# Allegro board 88E6071_TEST_V10B.brd
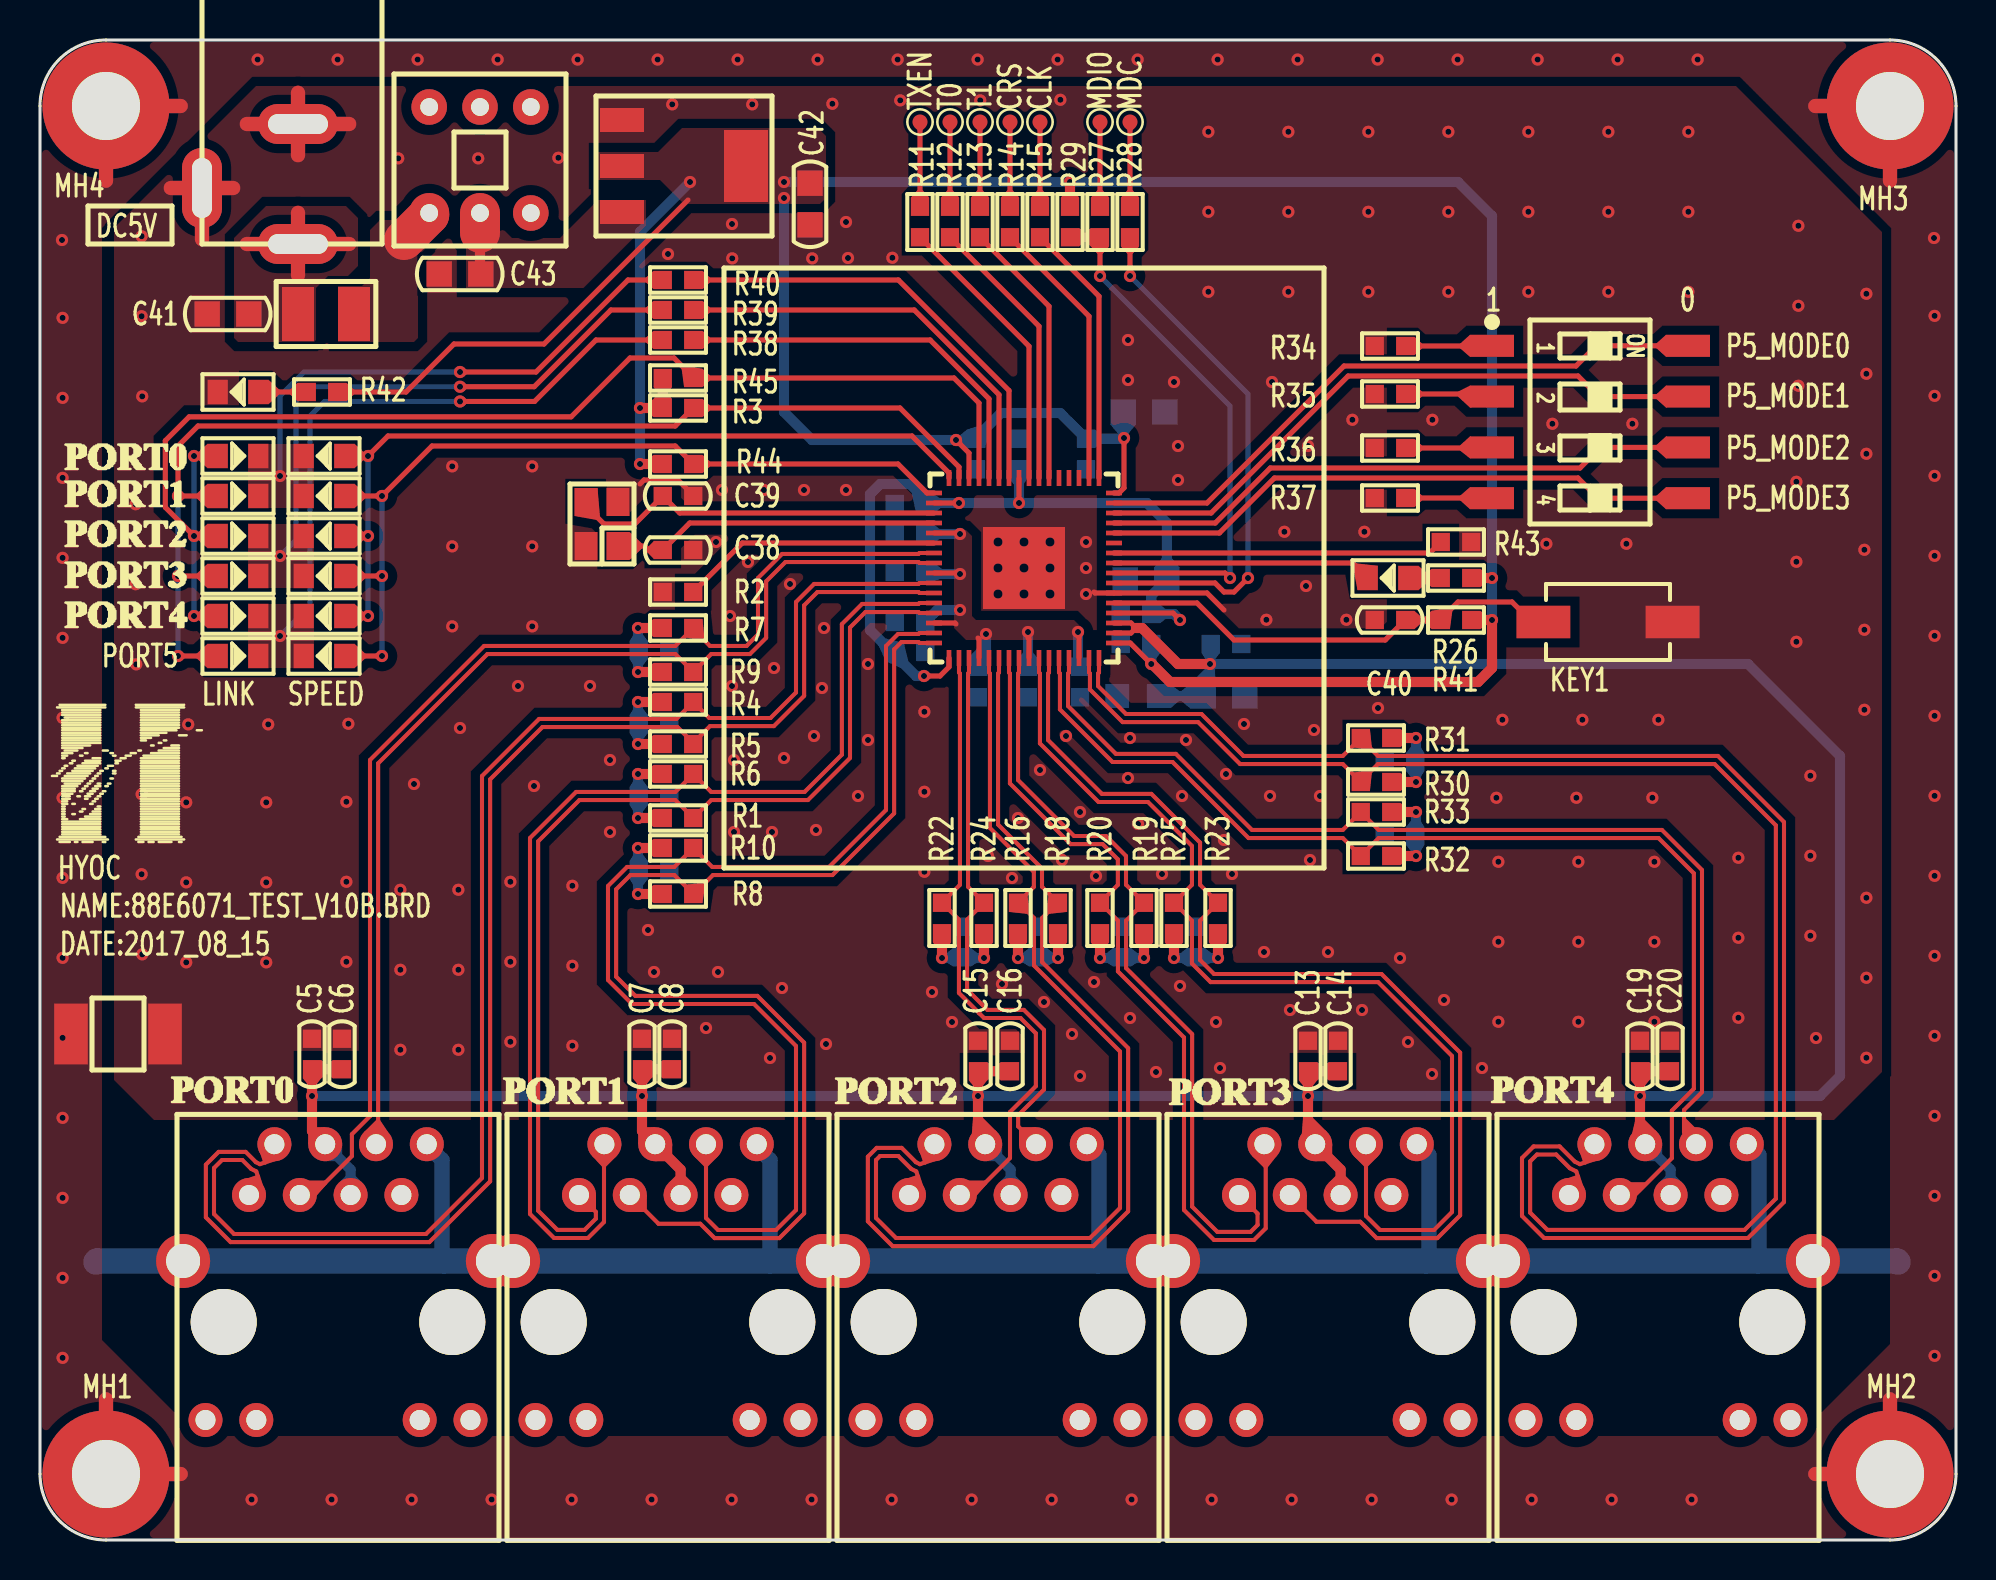
[diagram p0: board, top side]
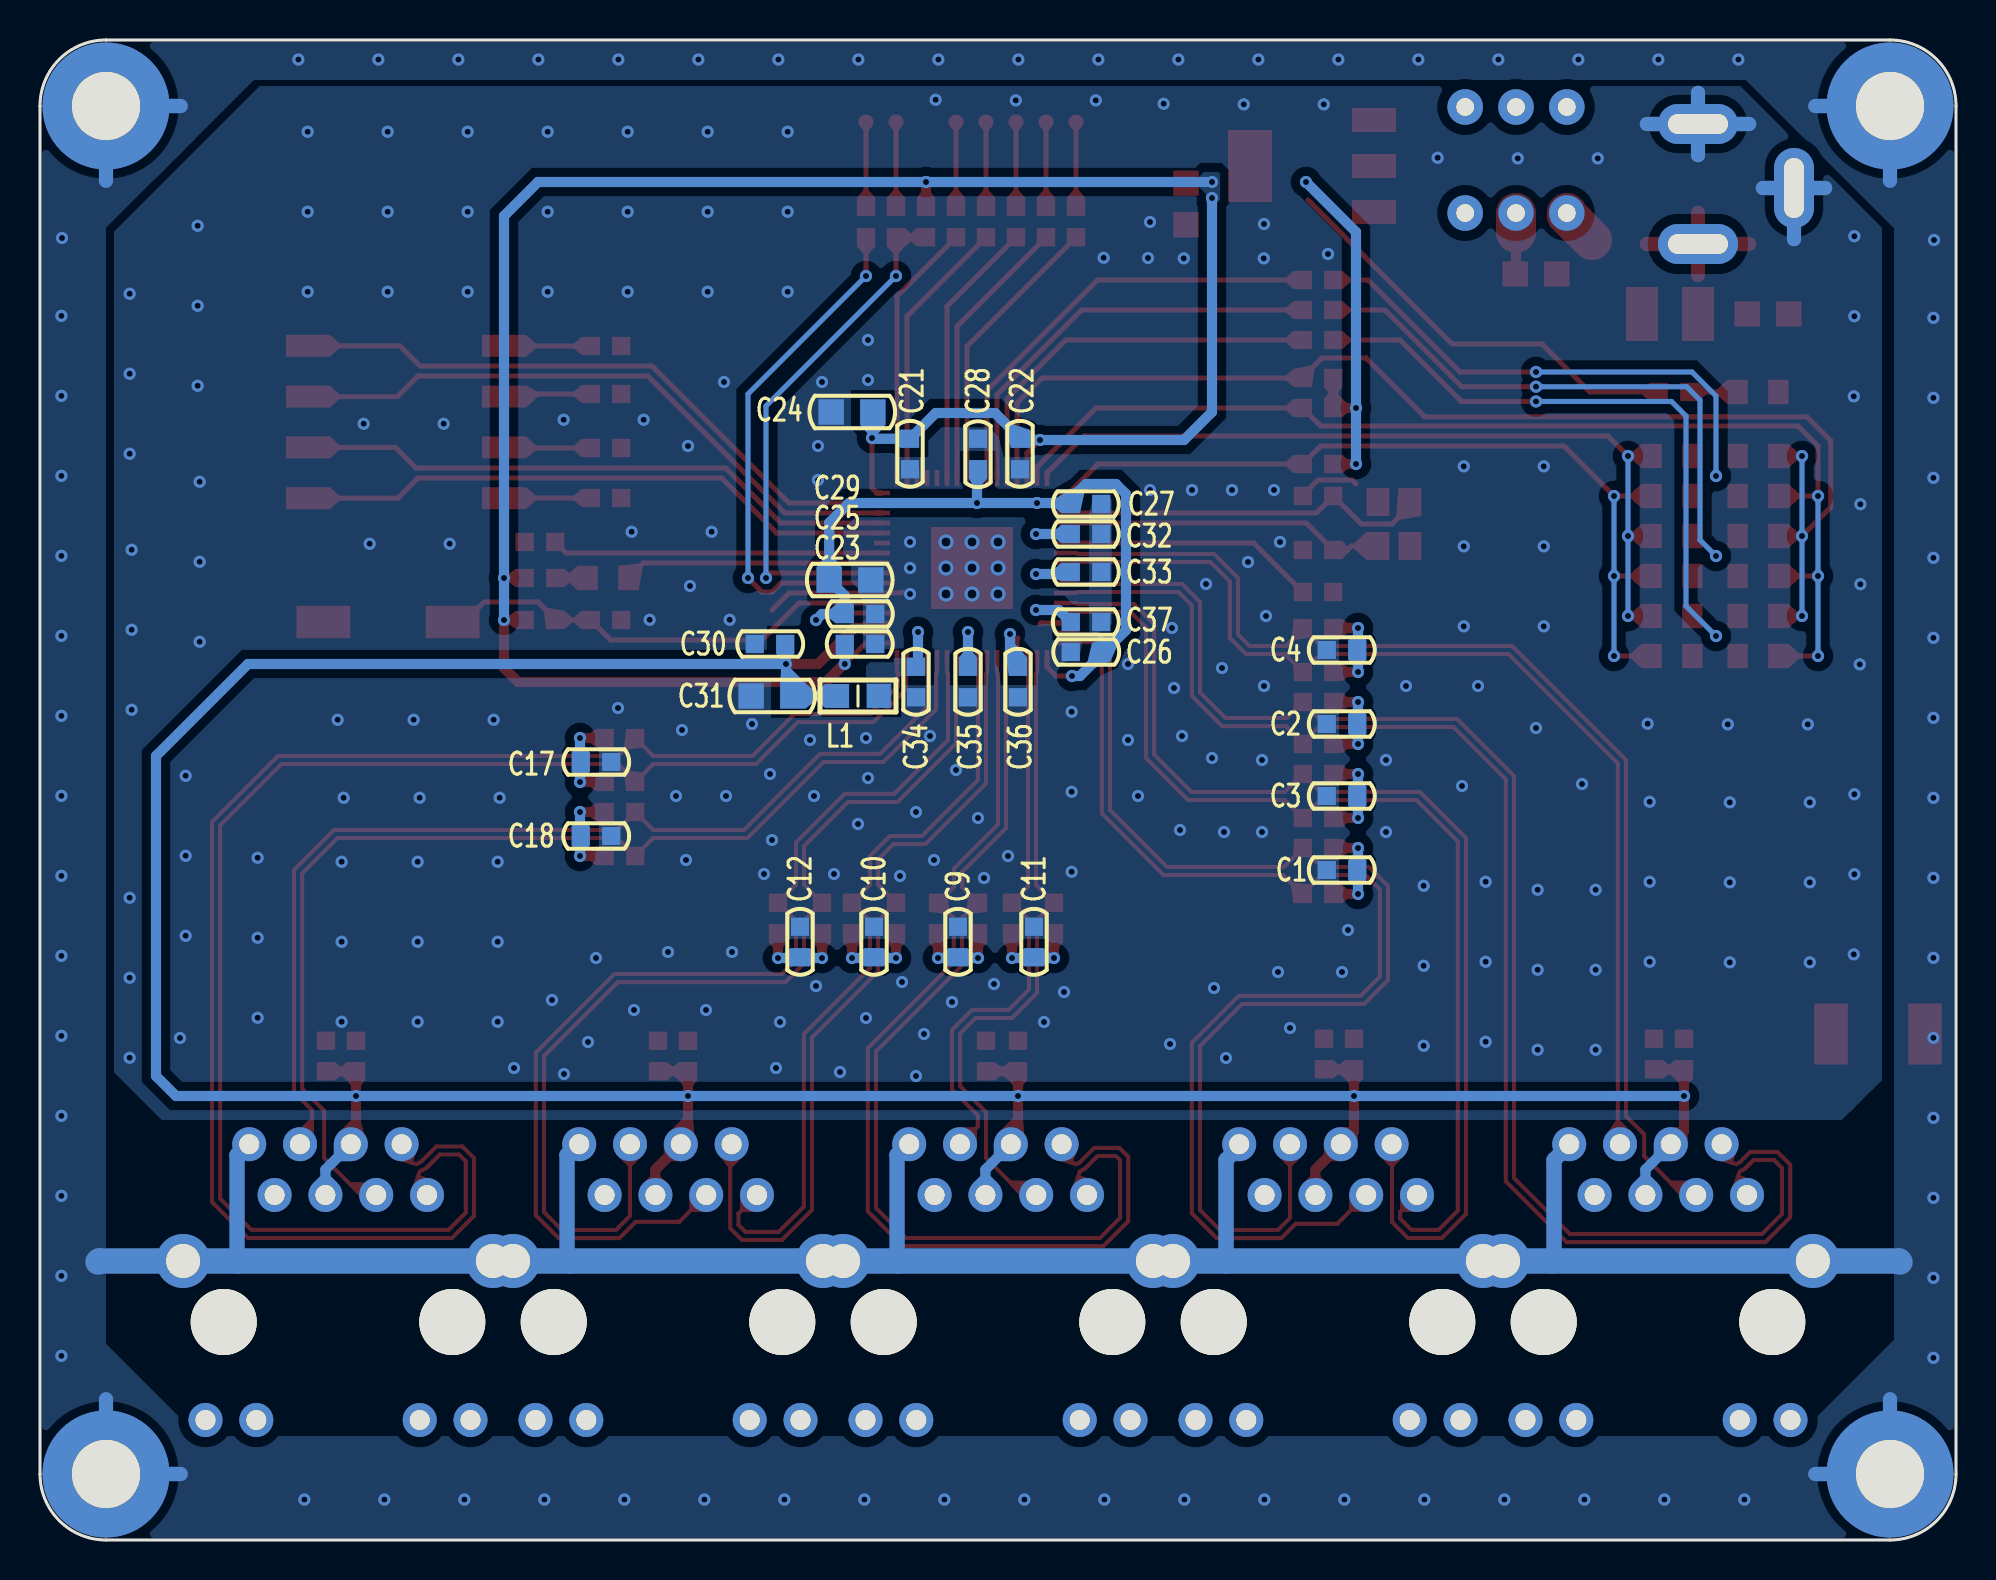
[diagram p1: board, bottom side, seen from below]

Outline 95.8 x 75 mm; copper layers: TOP, BOTTOM. Coordinates in mm from the lower left corner of the outline.
Outline path: 0,71.7 0,3.3 arc(0.97,0.97) 3.3,0 92.5,0 arc(94.83,0.97) 95.8,3.3 95.8,71.7 arc(94.83,74.03) 92.5,75 3.3,75 arc(0.97,74.03) 0,71.7

## Design rules (mm)
net group DP1: nets RXN0 RXP0
net group DP2: nets RXN1 RXP1
net group DP3: nets RXN2 RXP2
net group DP4: nets RXN3 RXP3
net group DP5: nets RXN4 RXP4
net group DP6: nets TXN0 TXP0
net group DP7: nets TXN1 TXP1
net group DP8: nets TXN2 TXP2
net group DP9: nets TXN3 TXP3
net group DP10: nets TXN4 TXP4

## Placement (name value [footprint] x y rotation side)
C1  10nF_50V  [CC0603]  30.7 33.5 0 bottom
C2  10nF_50V  [CC0603]  30.7 40.8 0 bottom
C3  10nF_50V  [CC0603]  30.7 37.2 0 bottom
C4  10nF_50V  [CC0603]  30.7 44.5 0 bottom
C5  0.1uF_50V  [CC0603]  13.6 24.3 270 top
C6  1nF_50V  [CC0603]  15.1 24.3 270 top
C7  0.1uF_50V  [CC0603]  30.1 24.3 270 top
C8  1nF_50V  [CC0603]  31.6 24.3 270 top
C9  10nF_50V  [CC0603]  49.9 29.9 90 bottom
C10  10nF_50V  [CC0603]  54.1 29.9 90 bottom
C11  10nF_50V  [CC0603]  46.1 29.9 90 bottom
C12  10nF_50V  [CC0603]  57.8 29.9 90 bottom
C13  0.1uF_50V  [CC0603]  63.4 24.2 270 top
C14  1nF_50V  [CC0603]  64.9 24.2 270 top
C15  0.1uF_50V  [CC0603]  46.9 24.2 270 top
C16  1nF_50V  [CC0603]  48.5 24.2 270 top
C17  10nF_50V  [CC0603]  68 38.9 180 bottom
C18  10nF_50V  [CC0603]  68 35.2 180 bottom
C19  0.1uF_50V  [CC0603]  80 24.2 270 top
C20  1nF_50V  [CC0603]  81.5 24.2 270 top
C21  0.1uF_50V  [CC0603]  52.3 54.3 90 bottom
C22  0.1uF_50V  [CC0603]  46.8 54.3 90 bottom
C23  0.1uF_50V  [CC0603]  54.8 44.8 0 bottom
C24  10uF_25V  [CC0805]  55.2 56.4 180 bottom
C25  0.1uF_50V  [CC0603]  54.8 46.3 0 bottom
C26  0.1uF_50V  [CC0603]  43.5 44.4 180 bottom
C27  0.1uF_50V  [CC0603]  43.5 51.8 0 bottom
C28  0.1uF_50V  [CC0603]  48.9 54.3 270 bottom
C29  10uF_25V  [CC0805]  55.3 48 0 bottom
C30  0.1uF_50V  [CC0603]  59.3 44.8 180 bottom
C31  10uF_25V  [CC0805]  59.2 42.2 180 bottom
C32  0.1uF_50V  [CC0603]  43.5 50.3 0 bottom
C33  0.1uF_50V  [CC0603]  43.5 48.4 0 bottom
C34  0.1uF_50V  [CC0603]  52 42.9 90 bottom
C35  0.1uF_50V  [CC0603]  49.4 42.9 90 bottom
C36  0.1uF_50V  [CC0603]  46.9 42.9 90 bottom
C37  0.1uF_50V  [CC0603]  43.5 45.9 0 bottom
C38  20pF_50V  [CC0603]  31.9 49.5 180 top
C39  20pF_50V  [CC0603]  31.9 52.2 180 top
C40  470pF_50V  [CC0603]  67.5 46 180 top
C41  10uF_25V  [CC0805]  9.4 61.3 180 top
C42  10uF_25V  [CC0805]  38.5 66.8 270 top
C43  10uF_25V  [CC0805]  21 63.3 180 top
D1  LED_GREEN  [LED0805]  67.4 48.1 180 top
D2  LED_GREEN  [LED0805]  14.2 54.2 180 top
D3  LED_GREEN  [LED0805]  14.2 52.2 180 top
D4  LED_GREEN  [LED0805]  14.2 50.2 180 top
D5  LED_GREEN  [LED0805]  14.2 48.2 180 top
D6  LED_GREEN  [LED0805]  14.2 46.2 180 top
D7  LED_GREEN  [LED0805]  14.2 44.2 180 top
D8  LED_YELLOW  [LED0805]  9.9 54.2 0 top
D9  LED_YELLOW  [LED0805]  9.9 52.2 0 top
D10  LED_YELLOW  [LED0805]  9.9 50.2 0 top
D11  LED_YELLOW  [LED0805]  9.9 48.2 0 top
D12  LED_YELLOW  [LED0805]  9.9 46.2 0 top
D13  LED_YELLOW  [LED0805]  9.9 44.2 0 top
D14  LED_GREEN  [LED0805]  9.9 57.4 180 top
DC1  -  [DC005]  12.9 70.8 270 top
F1  SMD1210-6V2A  [SMD-1210]  14.3 61.3 0 top
FB1  FBMH4532HM132-T  [L1812]  3.9 25.3 0 top
J1  -  [HR911105A]  14.9 10.9 180 top
J2  -  [HR911105A]  31.4 10.9 180 top
J3  -  [HR911105A]  64.4 10.9 180 top
J4  -  [HR911105A]  47.9 10.9 180 top
J5  -  [HR911105A]  80.9 10.9 180 top
KEY1  KEY  [KEY_SMD_2]  78.4 45.9 0 top
L1  BEAD_BLM21PG600  [LC0805]  54.9 42.2 180 bottom
MH1  HOLD-M3  [HOLD250D134]  3.3 3.3 0 top
MH2  HOLD-M3  [HOLD250D134]  92.5 3.3 0 top
MH3  HOLD-M3  [HOLD250D134]  92.5 71.7 0 top
MH4  HOLD-M3  [HOLD250D134]  3.3 71.7 0 top
NOREF  -  []  0 0 0 top
NOREF#2  -  []  0 0 0 top
NOREF#3  -  []  0 0 90 top
NOREF#4  -  []  0 0 90 top
NOREF#5  -  []  0 0 0 top
NOREF#6  -  []  0 0 90 top
R1  49.9R  [RC0603]  31.9 36.1 0 top
R2  4.99K  [RC0603]  31.9 47.4 0 top
R3  4.7K  [RC0603]  31.9 56.6 180 top
R4  49.9R  [RC0603]  31.9 41.9 0 top
R5  49.9R  [RC0603]  31.9 39.8 0 top
R6  49.9R  [RC0603]  31.9 38.3 0 top
R7  49.9R  [RC0603]  31.9 45.6 0 top
R8  49.9R  [RC0603]  31.9 32.3 0 top
R9  49.9R  [RC0603]  31.9 43.4 0 top
R10  49.9R  [RC0603]  31.9 34.6 0 top
R11  0R  [RC0603]  44 65.9 90 top
R12  0R  [RC0603]  45.5 65.9 90 top
R13  0R  [RC0603]  47 65.9 90 top
R14  20R  [RC0603]  48.5 65.9 90 top
R15  0R  [RC0603]  50 65.9 90 top
R16  49.9R  [RC0603]  48.9 31.1 90 top
R18  49.9R  [RC0603]  50.9 31.1 90 top
R19  49.9R  [RC0603]  55.2 31.1 90 top
R20  49.9R  [RC0603]  53 31.1 90 top
R22  49.9R  [RC0603]  45.1 31.1 90 top
R23  49.9R  [RC0603]  58.9 31.1 90 top
R24  49.9R  [RC0603]  47.2 31.1 90 top
R25  49.9R  [RC0603]  56.7 31.1 90 top
R26  150R  [RC0603]  70.8 48.1 0 top
R27  0R  [RC0603]  53 65.9 90 top
R28  0R  [RC0603]  54.5 65.9 90 top
R29  4.7K  [RC0603]  51.5 65.9 90 top
R30  49.9R  [RC0603]  66.8 37.9 180 top
R31  49.9R  [RC0603]  66.8 40.1 180 top
R32  49.9R  [RC0603]  66.8 34.2 180 top
R33  49.9R  [RC0603]  66.8 36.4 180 top
R34  4.7K  [RC0603]  67.5 59.7 0 top
R35  4.7K  [RC0603]  67.5 57.3 0 top
R36  4.7K  [RC0603]  67.5 54.6 0 top
R37  4.7K  [RC0603]  67.5 52.1 0 top
R38  150R  [RC0603]  31.9 60 180 top
R39  150R  [RC0603]  31.9 61.5 180 top
R40  150R  [RC0603]  31.9 63 180 top
R41  5.9K  [RC0603]  70.8 46 180 top
R42  2K  [RC0603]  14.1 57.4 0 top
R43  0R/NI  [RC0603]  70.8 49.9 0 top
R44  4.7K  [RC0603]  31.9 53.8 180 top
R45  4.7K/NI  [RC0603]  31.9 58.1 180 top
SW2  -  [DM-04-V]  77.5 55.9 270 top
TP4  TestPoint  [TP-0R75]  44 70.9 0 top
TP5  TestPoint  [TP-0R75]  45.5 70.9 0 top
TP6  TestPoint  [TP-0R75]  47 70.9 0 top
TP7  TestPoint  [TP-0R75]  48.5 70.9 0 top
TP8  TestPoint  [TP-0R75]  50 70.9 0 top
TP9  TestPoint  [TP-0R75]  53 70.9 0 top
TP10  TestPoint  [TP-0R75]  54.5 70.9 0 top
U1  88E6071-xx-NNC2I000  [QFN-64]  49.2 48.6 270 top
U2  X322525MSB4SI  [X-4P-3R2X2R5-SMD]  28.1 50.8 90 top
U3  AMS1117-3.3  [SOT-223]  32.2 68.7 270 top
U21  -  [SWITCH_6P]  22 69 0 top

## Library data of the parts
C1-C39 C41-C43 = CAP NP_2
C40 = CAP NP
D1-D14 = LED_4
DC1 = DC005
F1 = FUSE
FB1 = FB
J1-J5 = CON_RJ45_1X8_F_RA_0
KEY1 = SW PUSHBUTTON_0
L1 = IND_BEAD_0805_600OHM_1
MH1-MH4 = Hold_1
R1-R16 R18-R20 R22-R45 = R_Generic
SW2 = SW DIP-4_0
TP4-TP10 = TestPoint
U1 = 88E6071-xx-NNC2I000
U2 = TSX-3225
U3 = AMS1117-3.3
U21 = SWITCH_6P

## Footprints (pads in the part's own frame, mm; a bottom-side part is the same pattern mirrored in y, then rotated)
CC0603
  rect 0.914x0.914 smd: 1(-0.762,0) 2(0.762,0)
CC0805
  rect 1.27x1.27 smd: 1(-1.041,0) 2(1.041,0)
DC005
  oval 2x4 hole 1x3: 1(6,0) 2(0,0)
  oval 4x2 hole 3x1: 3(3.2,-4.8)
DM-04-V
  rect 1.1x2.2 smd: 1(-3.81,-4.9) 2(-1.27,-4.9) 3(1.27,-4.9) 4(3.81,-4.9) 5(3.81,4.9) 6(1.27,4.9) 7(-1.27,4.9) 8(-3.81,4.9)
HOLD250D134
  round 6.35 hole 3.404: 1(0,0)
HR911105A
  round 3.3 hole 3.3 unplated: (-5.715,0) (5.715,0)
  round 1.699 hole 1.001: 1(4.45,-6.35) 2(3.18,-8.89) 3(1.91,-6.35) 4(0.64,-8.89) 5(-0.63,-6.35) 6(-1.9,-8.89) 7(-3.17,-6.35) 8(-4.44,-8.89) 9(6.625,4.9) 10(4.085,4.9) 11(-4.085,4.9) 12(-6.625,4.9)
  round 2.7 hole 1.7: 13(7.745,-3.05) 14(-7.745,-3.05)
KEY_SMD_2
  rect 2.692x1.626 smd: 1(-3.23,0) 2(3.23,0)
L1812
  rect 1.676x3.048 smd: 1(-2.349,0) 2(2.349,0)
LC0805
  rect 1.194x1.194 smd: 1(-1.041,0) 2(1.041,0)
LED0805
  rect 1.016x1.219 smd: 1(-1.016,0) 2(1.016,0)
QFN-64
  rect 0.23x0.8 smd: 1(-3.75,-4.5) 2(-3.25,-4.5) 3(-2.75,-4.5) 4(-2.25,-4.5) 5(-1.75,-4.5) 6(-1.25,-4.5) 7(-0.75,-4.5) 8(-0.25,-4.5) 9(0.25,-4.5) 10(0.75,-4.5) 11(1.25,-4.5) 12(1.75,-4.5) 13(2.25,-4.5) 14(2.75,-4.5) 15(3.25,-4.5) 16(3.75,-4.5) 33(3.75,4.5) 34(3.25,4.5) 35(2.75,4.5) 36(2.25,4.5) 37(1.75,4.5) 38(1.25,4.5) 39(0.75,4.5) 40(0.25,4.5) 41(-0.25,4.5) 42(-0.75,4.5) 43(-1.25,4.5) 44(-1.75,4.5) 45(-2.25,4.5) 46(-2.75,4.5) 47(-3.25,4.5) 48(-3.75,4.5)
  rect 0.8x0.23 smd: 17(4.5,-3.75) 18(4.5,-3.25) 19(4.5,-2.75) 20(4.5,-2.25) 21(4.5,-1.75) 22(4.5,-1.25) 23(4.5,-0.75) 24(4.5,-0.25) 25(4.5,0.25) 26(4.5,0.75) 27(4.5,1.25) 28(4.5,1.75) 29(4.5,2.25) 30(4.5,2.75) 31(4.5,3.25) 32(4.5,3.75) 49(-4.5,3.75) 50(-4.5,3.25) 51(-4.5,2.75) 52(-4.5,2.25) 53(-4.5,1.75) 54(-4.5,1.25) 55(-4.5,0.75) 56(-4.5,0.25) 57(-4.5,-0.25) 58(-4.5,-0.75) 59(-4.5,-1.25) 60(-4.5,-1.75) 61(-4.5,-2.25) 62(-4.5,-2.75) 63(-4.5,-3.25) 64(-4.5,-3.75)
  rect 4.1x4.1 smd: 65(0,0)
RC0603
  rect 0.914x0.914 smd: 1(-0.762,0) 2(0.762,0)
SMD-1210
  rect 1.6x2.7 smd: 1(-1.4,0) 2(1.4,0)
SOT-223
  rect 1.2x2.2 smd: 1(-2.3,-3.1) 2(0,-3.1) 3(2.3,-3.1)
  rect 3.6x2.2 smd: 4(0,3.1)
SWITCH_6P
  round 1.778 hole 0.889: 1(-2.54,-2.65) 2(0,-2.65) 3(2.54,-2.65) 4(2.54,2.65) 5(0,2.65) 6(-2.54,2.65)
TP-0R75
  round 0.75 smd: 1(0,0)
X-4P-3R2X2R5-SMD
  rect 1.4x1.15 smd: 1(-1.1,-0.8) 2(1.1,-0.8) 3(1.1,0.8) 4(-1.1,0.8)

## Nets
GND: C1.2 C2.2 C3.2 C4.2 C5.1 C6.1 C7.1 C8.1 C9.2 C10.2 C11.2 C12.2 C13.1 C14.1 C15.1 C16.1 C17.2 C18.2 C19.1 C20.1 C21.1 C22.1 C23.1 C24.1 C25.1 C26.1 C27.1 C28.1 C29.1 C30.1 C31.1 C32.1 C33.1 C34.1 C35.1 C36.1 C37.1 C38.1 C39.1 C40.2 C41.2 C42.2 C43.2 D14.2(CATHODE) DC1.2 DC1.3 FB1.2 KEY1.2 R2.1 R34.1 R35.1 R36.1 R37.1 R43.2 U1.38(VSS) U1.65(GND) U2.2(GND1) U2.4(GND2) U3.1(GND)
GND_EARTH: FB1.1 J1.8 J1.13(EG2) J1.14(EG1) J2.8 J2.13(EG2) J2.14(EG1) J3.8 J3.13(EG2) J3.14(EG1) J4.8 J4.13(EG2) J4.14(EG1) J5.8 J5.13(EG2) J5.14(EG1) MH1.1 MH2.1 MH3.1 MH4.1
VCC_3.3V_SWITCH: C21.2 C22.2 C23.2 C24.2 C42.1 R3.2 R26.2 R29.2 R41.1 R42.2 R44.2 R45.2 U1.33(VDD33) U1.48(P5_VDDO) U1.62(EE_VDDO) U3.2(OUT_1) U3.4(OUT_2)
VCC_5V: C41.1 DC1.1 F1.1
C0_LED: D8.1(ANODE) D10.1(ANODE) D12.1(ANODE) R45.1 U1.61(EE_DIN/C0_LED/EEE)
C1_LED: D9.1(ANODE) D11.1(ANODE) D13.1(ANODE) R3.1 U1.63(EE_CLK/C1_LED/FLOW)
C2_LED: D2.1(ANODE) D4.1(ANODE) D6.1(ANODE) U1.64(EE_CS/C2_LED/EE_WE)
C3_LED: D3.1(ANODE) D5.1(ANODE) D7.1(ANODE) R44.1 U1.1(EE_DOUT/C3_LED)
CLK_50M: R15.2 TP8.1
E6071_AVDD_1.8V: C32.2 C33.2 C34.2 C35.2 C36.2 C37.2 L1.2(B) U1.5(AVDD) U1.9(P0_AVDD) U1.14(P1_AVDD) U1.20(P2_AVDD) U1.25(P3_AVDD) U1.30(P4_AVDD)
E6071_CT_1.8V: C5.2 C6.2 C7.2 C8.2 C13.2 C14.2 C15.2 C16.2 C19.2 C20.2 C30.2 C31.2 J1.4 J1.5 J2.4 J2.5 J3.4 J3.5 J4.4 J4.5 J5.4 J5.5 L1.1(A) U1.34(VDD18(OUT)) U1.35(VDD18(IN))
E6071_VDD_CORE_1.2V: C25.2 C26.2 C27.2 C28.2 C29.2 U1.2(VDD_CORE_1) U1.17(VDD_CORE_2) U1.36(VDD_CORE(OUT&IN)) U1.57(VDD_CORE_3)
INTN: D1.2(CATHODE) U1.41(INTN)
MDC: R28.1 U1.39(MDC_CPU)
MDIO: R27.1 R29.1 U1.40(MDIO_CPU)
P5_ID0: R12.1 U1.55(P5_IND0/P5_ID0)
P5_ID1: R13.1 U1.54(P5_IND1/P5_ID1)
P5_INDV: R11.1 U1.56(P5_INDV/P5_ICTL)
P5_MODE0: SW2.8 U1.47(P5_OUTD0/P5_OD0/P5_MODE0)
P5_MODE1: SW2.7 U1.46(P5_OUTD1/P5_OD1/P5_MODE1)
P5_MODE2: SW2.6 U1.45(P5_OUTD2/P6_OD0/P5_MDDE2)
P5_MODE3: SW2.5 U1.44(P5_OUTD3/P6_OD1/P5_MODE3)
P5_OUTCLK: R15.1 U1.49(P5_OUTCLK/P5_REFCLK)
P5_OUTDV: R14.1 U1.50(P5_OUTEN/P5_OCTL/P5_SEL)
R0_LED: R40.1 U1.58(R0_LED/ADDR4)
R1_LED: R39.1 U1.59(R1_LED/NO_CPU)
R2_LED: R38.1 U1.60(R2_LED)
RESETN: C40.1 KEY1.1 R41.2 U1.37(RESETN)
RMII0_CRS_DV: R14.2 TP7.1
RMII0_MDC: R28.2 TP10.1
RMII0_MDIO: R27.2 TP9.1
RMII0_TXD0: R12.2 TP5.1
RMII0_TXD1: R13.2 TP6.1
RMII0_TXEN: R11.2 TP4.1
RXN0: J1.6(RXN1) R9.2 U1.8(P0_RXN)
RXN1: J2.6(RXN1) R10.2 U1.15(P1_RXN)
RXN2: J4.6(RXN1) R24.2 U1.19(P2_RXN)
RXN3: J3.6(RXN1) R25.2 U1.26(P3_RXN)
RXN4: J5.6(RXN1) R33.2 U1.29(P4_RXN)
RXP0: J1.3(RXP1) R7.2 U1.7(P0_RXP)
RXP1: J2.3(RXP1) R8.2 U1.16(P1_RXP)
RXP2: J4.3(RXP1) R22.2 U1.18(P2_RXP)
RXP3: J3.3(RXP1) R23.2 U1.27(P3_RXP)
RXP4: J5.3(RXP1) R32.2 U1.28(P4_RXP)
TXN0: J1.2(TXN1) R5.2 U1.11(P0_TXN)
TXN1: J2.2(TXN1) R6.2 U1.12(P1_TXN)
TXN2: J4.2(TXN1) R18.2 U1.22(P2_TXN)
TXN3: J3.2(TXN1) R20.2 U1.23(P3_TXN)
TXN4: J5.2(TXN1) R31.2 U1.32(P4_TXN)
TXP0: J1.1(TXP1) R4.2 U1.10(P0_TXP)
TXP1: J2.1(TXP1) R1.2 U1.13(P1_TXP)
TXP2: J4.1(TXP1) R16.2 U1.21(P2_TXP)
TXP3: J3.1(TXP1) R19.2 U1.24(P3_TXP)
TXP4: J5.1(TXP1) R30.2 U1.31(P4_TXP)
XTAL_IN: C39.2 U1.3(XTAL_IN) U2.3(OUT2)
XTAL_OUT: C38.2 U1.4(XTAL_OUT) U2.1(OUT1)
N16836550: R2.2 U1.6(IREF)
N16838678: D6.2(CATHODE) D7.2(CATHODE) D12.2(CATHODE) D13.2(CATHODE) R38.2
N16838681: D4.2(CATHODE) D5.2(CATHODE) D10.2(CATHODE) D11.2(CATHODE) R39.2
N16838688: D2.2(CATHODE) D3.2(CATHODE) D8.2(CATHODE) D9.2(CATHODE) R40.2
N16857523: C2.1 R4.1 R5.1
N16857564: C4.1 R7.1 R9.1
N16859623: C3.1 R1.1 R6.1
N16859644: C1.1 R8.1 R10.1
N16860087: C9.1 R16.1 R18.1
N16860108: C11.1 R22.1 R24.1
N16860576: C10.1 R19.1 R20.1
N16860597: C12.1 R23.1 R25.1
N16861090: C17.1 R30.1 R31.1
N16861111: C18.1 R32.1 R33.1
N16866521: D14.1(ANODE) R42.1
N16892343: C43.1 U3.3(IN) U21.2
N16893416: R43.1 U1.42(P5_COL/P6_REFCLK/GPIO[1]/SDET)
N16893933: R34.2 SW2.1
N16893936: R35.2 SW2.2
N16893945: R36.2 SW2.3
N16893954: R37.2 SW2.4
N16894369: F1.2 U21.1
N168368250: D1.1(ANODE) R26.1

Pads without a net: J1 7 9 10 11 12; J2 7 9 10 11 12; J3 7 9 10 11 12; J4 7 9 10 11 12; J5 7 9 10 11 12; U1 43 51 52 53; U21 3 4 5 6

## Via types
v1: diameter 0.61, hole 0.305, TOP to BOTTOM, 353 vias
v2: diameter 0.762, hole 0.457, TOP to BOTTOM, 9 vias

## Routing (per net, layer and track width the routed paths; a pad name or vN(x,y) marks a point on that pad's centre or on a via; arc(x,y) is an arc through that point)
GND: length 37.8
  TOP w0.254: 52.7,47.4 52.75,47.35 U1.38 58.35,47.35 59.2,46.5 ; C39.1 32.66,52.24 31.9,53 30.2,53 30,52.8
  TOP w0.711: 10.34,70.8 DC1.2 ; DC1.2 15.46,70.8 ; DC1.2 12.9,69.24 ; DC1.2 12.9,72.36 ; DC1.3 9.66,67.6 ; DC1.3 8.1,65.04 ; DC1.3 6.54,67.6
  BOTTOM w0.711: DC1.2 12.9,72.36 ; DC1.2 10.34,70.8 ; DC1.2 12.9,69.24 ; DC1.2 15.46,70.8 ; 6.54,67.6 DC1.3 ; DC1.3 9.66,67.6 ; DC1.3 8.1,65.04
  vias: v1(4.78,51.79) v1(4.78,47.79) v1(4.81,43.78) v1(5.08,65.19) v1(5.08,61.19) v1(5.11,57.18) v1(5.08,37.29) v1(5.08,33.29) v1(5.11,29.28) v1(7.31,36.88) v1(7.31,32.88) v1(7.31,28.88) v1(7.41,40.78) v1(11.31,36.88) v1(11.31,32.88) v1(11.31,28.88) v1(11.41,40.78) v1(15.32,36.91) v1(15.32,32.91) v1(15.32,28.91) v1(15.42,40.81) v1(17.91,69.08) v1(18.02,32.51) v1(18.02,28.51) v1(18.02,24.51) v1(18.7,37.8) v1(20.61,53.68) v1(20.61,49.68) v1(20.61,45.68) v1(20.92,32.51) v1(20.92,28.51) v1(20.92,24.51) v1(21,40.6) v1(21.91,69.08) v1(23.52,32.91) v1(23.52,28.91) v1(23.52,24.91) v1(23.9,42.7) v1(24.61,53.68) v1(24.61,49.68) v1(24.61,45.68) v1(24.7,37.7) v1(25.92,69.11) v1(26.62,32.71) v1(26.62,28.71) v1(26.62,24.71) v1(27.5,42.7) v1(28.5,39) v1(28.5,35.4) v1(30.4,30.5) v1(30.7,28.4) v1(31.4,64.3) v1(31.61,71.78) v1(33.3,25.6) v1(33.8,49.9) v1(33.9,28.4) v1(34.1,52.5) v1(34.5,46.2) v1(34.6,65.8) v1(34.61,64.08) v1(34.6,42.7) v1(34.7,39) v1(34.7,35.4) v1(35.4,48.9) v1(35.61,71.78) v1(36.2,52.5) v1(36.5,24.1) v1(36.6,35.4) v1(36.7,43.6) v1(37.1,27.6) v1(37.2,39.1) v1(37.5,47.8) v1(38.2,52.5) v1(38.61,64.08) v1(38.7,40.2) v1(38.8,35.5) v1(39.1,42.6) v1(39.2,45.6) v1(39.3,24.8) v1(39.62,71.81) v1(40.3,65.9) v1(40.3,52.5) v1(40.4,64.1) v1(40.9,37.2) v1(41.4,43.8) v1(41.4,40) v1(42.62,64.11) v1(43.01,71.98) v1(44.22,41.41) v1(44.22,37.41) v1(44.22,33.41) v1(44.6,27.4) v1(45.6,25.9) v1(47.01,71.98) v1(47.4,34.2) v1(48.1,27.8) v1(48.6,33.1) v1(48.9,36.1) v1(50,38.5) v1(50.2,26.9) v1(51.02,72.01) v1(51.1,34) v1(51.3,40.2) v1(51.6,25.3) v1(52,36.4) v1(52,23.2) v1(52.3,49.9) v1(52.3,48.6) v1(52.3,47.3) v1(52.7,27.9) v1(52.8,33.2) v1(54.4,60) v1(54.4,58) v1(54.4,38.1) v1(54.5,40.1) v1(54.5,26.1) v1(54.9,35.8) v1(55.8,23.4) v1(56.1,33.3) v1(56.7,57.9) v1(56.9,54.7) v1(56.9,53) v1(57,27.7) v1(57.1,37.2) v1(57.3,40) v1(58.42,70.41) v1(58.42,66.41) v1(58.42,62.41) v1(58.8,25.9) v1(59,23.6) v1(59.2,35) v1(59.3,38.3) v1(59.6,33.3) v1(60.2,40.8) v1(61.2,29.4) v1(61.32,46.01) v1(61.5,37.2) v1(61.6,57.9) v1(62.22,50.41) v1(62.42,70.41) v1(62.42,66.41) v1(62.42,62.41) v1(62.5,26.5) v1(63.3,47.7) v1(63.4,54.7) v1(63.5,34) v1(63.7,40.5) v1(64,37.2) v1(64.4,29.4) v1(65.32,46.01) v1(65.62,56.01) v1(66.1,26.5) v1(66.22,50.41) v1(66.42,70.41) v1(66.42,66.41) v1(66.42,62.41) v1(66.9,41.6) v1(68,29.1) v1(68.4,24.9) v1(69.62,56.01) v1(69.6,23.3) v1(70.2,27) v1(70.42,70.41) v1(70.42,66.41) v1(70.42,62.41) v1(72.1,23.6) v1(72.82,37.11) v1(72.92,33.91) v1(72.92,29.91) v1(72.92,25.91) v1(73.12,41.01) v1(74.42,70.41) v1(74.42,66.41) v1(74.42,62.41) v1(75.32,49.81) v1(75.62,55.81) v1(76.82,37.11) v1(76.92,33.91) v1(76.92,29.91) v1(76.92,25.91) v1(77.12,41.01) v1(78.42,70.41) v1(78.42,66.41) v1(78.42,62.41) v1(79.32,49.81) v1(79.62,55.81) v1(80.62,37.11) v1(80.72,33.91) v1(80.72,29.91) v1(80.72,25.91) v1(80.92,41.01) v1(82.42,70.41) v1(82.42,66.41) v1(82.42,62.41) v1(84.92,34.11) v1(84.92,30.11) v1(84.92,26.11) v1(87.82,52.91) v1(87.82,48.91) v1(87.82,44.91) v1(87.92,65.71) v1(87.92,61.71) v1(87.92,57.71) v1(88.52,38.21) v1(88.52,34.21) v1(88.52,30.21) v1(88.8,25.1) v1(91.22,49.51) v1(91.22,45.51) v1(91.22,41.51) v1(91.32,62.31) v1(91.32,58.31) v1(91.32,54.31) v1(91.32,32.11) v1(91.32,28.11) v1(91.32,24.11) v2(47.9,49.9) v2(47.9,48.6) v2(47.9,47.3) v2(49.2,49.9) v2(49.2,48.6) v2(49.2,47.3) v2(50.5,49.9) v2(50.5,48.6) v2(50.5,47.3)
GND_EARTH: length 179.7
  TOP w0.711: 92.5,67.97 MH3.1 88.77,71.7 ; 3.3,67.97 MH4.1 7.03,71.7 ; 7.03,3.3 MH1.1 3.3,7.03 ; 92.5,7.03 MH2.1 88.77,3.3
  BOTTOM w0.711: 7.03,3.3 MH1.1 3.3,7.03 ; 7.03,71.7 MH4.1 3.3,67.97 ; 88.77,71.7 MH3.1 92.5,67.97 ; 92.5,7.03 MH2.1 88.77,3.3
  BOTTOM w0.762: 69.3,13.95 69.45,14.1 69.45,19.25 68.91,19.79 J3.8 ; J2.8 35.84,19.66 36.5,19 36.5,13.95 ; 85.9,13.95 85.95,14 85.95,19.25 85.41,19.79 J5.8 ; J1.8 19.34,19.76 20.1,19 20.1,14.05 20.2,13.95 ; 52.9,13.95 52.95,14 52.95,19.25 52.41,19.79 J4.8
  BOTTOM w1.27: 92.9,13.9 92.85,13.95 J5.13 J3.13 ; J4.14 J4.13 J2.14 J1.14 J1.13 2.85,13.95 2.8,13.9
  vias: v1(1.1,65) v1(1.13,61.11) v1(1.13,57.11) v1(1.13,53.11) v1(1.13,49.11) v1(1.13,45.11) v1(1.13,41.11) v1(1.13,37.11) v1(1.13,33.11) v1(1.13,29.11) v1(1.13,25.11) v1(1.13,21.11) v1(1.13,17.11) v1(1.13,13.11) v1(1.13,9.11) v1(10.58,2.02) v1(10.88,74.02) v1(14.58,2.02) v1(14.88,74.02) v1(18.58,2.02) v1(18.88,74.02) v1(22.58,2.02) v1(22.88,74.02) v1(26.58,2.02) v1(26.88,74.02) v1(30.58,2.02) v1(30.88,74.02) v1(34.58,2.02) v1(34.88,74.02) v1(38.58,2.02) v1(38.88,74.02) v1(42.58,2.02) v1(42.88,74.02) v1(46.58,2.02) v1(46.88,74.02) v1(50.58,2.02) v1(50.88,74.02) v1(54.58,2.02) v1(54.88,74.02) v1(58.58,2.02) v1(58.88,74.02) v1(62.58,2.02) v1(62.88,74.02) v1(66.58,2.02) v1(66.88,74.02) v1(70.58,2.02) v1(70.88,74.02) v1(74.58,2.02) v1(74.88,74.02) v1(78.58,2.02) v1(78.88,74.02) v1(82.58,2.02) v1(82.88,74.02) v1(94.7,65.1) v1(94.73,61.21) v1(94.73,57.21) v1(94.73,53.21) v1(94.73,49.21) v1(94.73,45.21) v1(94.73,41.21) v1(94.73,37.21) v1(94.73,33.21) v1(94.73,29.21) v1(94.73,25.21) v1(94.73,21.21) v1(94.73,17.21) v1(94.73,13.21) v1(94.73,9.21)
VCC_3.3V_SWITCH: length 159.4
  TOP w0.254: R42.2 18.3,57.4 20.7,59.8 25.2,59.8 32.4,67 ; U1.62 46.45,54.35 v1(45.8,55) ; U1.48 53.95,52.35 54.2,52.6 v1(54.2,55.1) ; U1.33 54.51,44.85 v1(55.56,43.8)
  TOP w0.508: v1(55.56,43.8) 55.6,43.8 56.5,42.9 71.9,42.9 72.6,43.6 v1(72.6,46) R41.1 ; R26.2 v1(72.6,48.1) ; v1(30,56.6) R3.2 R45.2 ; R44.2 v1(30,53.8) ; R29.2 v1(51.5,67.9)
  BOTTOM w0.508: C24.2 54.16,55.14 v1(54.2,55.1) 54.16,55.06 C21.2 51.01,56.35 48.05,56.35 47,55.3 47,55.26 C22.2 46.74,55 v1(45.8,55) 38.6,55 37.2,56.4 v1(37.2,67.1) ; v1(55.56,43.8) C23.2 ; v1(72.6,46) v1(72.6,48.1) 72.6,66.2 70.9,67.9 v1(51.5,67.9) v1(37.2,67.9) ; v1(30,53.8) v1(30,56.6) 30,65.4 v1(32.5,67.9)
VCC_5V: length 8.2
  TOP w0.711: DC1.1 12.9,66.36 ; DC1.1 12.9,63.24 ; DC1.1 15.46,64.8 ; DC1.1 10.34,64.8
C0_LED: length 64
  TOP w0.254: D8.1 v1(7.7,54.2) ; D10.1 v1(7.7,50.2) 6.26,51.63 6.26,54.97 7.46,56.16 26.56,56.16 29.5,59.1 31.7,59.1 32.66,58.14 R45.1 45.7,58.1 46.95,56.85 U1.61 ; D12.1 v1(7.7,46.2)
  BOTTOM w0.254: v1(7.7,46.2) v1(7.7,50.2) v1(7.7,54.2)
C1_LED: length 58.1
  TOP w0.254: D13.1 v1(6.9,44.2) ; U1.63 45.95,53.65 43,56.6 R3.1 31.76,55.7 7.9,55.7 6.9,54.7 v1(6.9,52.2) D9.1 ; v1(6.9,48.2) D11.1
  BOTTOM w0.254: v1(6.9,44.2) v1(6.9,48.2) v1(6.9,52.2)
C2_LED: length 42
  TOP w0.254: D6.1 v1(16.4,46.2) ; U1.64 45.45,53.35 43.6,55.2 17.4,55.2 v1(16.4,54.2) D2.1 ; v1(16.4,50.2) D4.1
  BOTTOM w0.254: v1(16.4,46.2) v1(16.4,50.2) v1(16.4,54.2)
C3_LED: length 43.3
  TOP w0.254: D7.1 v1(17.1,44.2) ; U1.1 44.35,52.35 42.9,53.8 R44.1 31.76,54.7 19.6,54.7 v1(17.1,52.2) D3.1 ; D5.1 v1(17.1,48.2)
  BOTTOM w0.254: v1(17.1,52.2) v1(17.1,48.2) v1(17.1,44.2)
CLK_50M: length 4.2
  TOP w0.254: R15.2 TP8.1
E6071_AVDD_1.8V: length 17.5
  TOP w0.254: 46.9,45.1 46.95,45.05 U1.20 ; 45.8,48.3 45.75,48.35 U1.9 ; U1.5 45.95,50.35 v1(46,50.3) ; 49.4,45.1 49.45,45.05 U1.25 ; 51.9,45.2 51.95,45.15 U1.30 ; U1.14 45.75,45.85 45.8,45.8
  BOTTOM w0.508: v1(46,46.5) 44.86,46.5 C37.2 ; C36.2 47.3,44.06 v1(47.3,45.3) ; v1(49.4,45.4) C35.2 ; C33.2 44.36,48.3 v1(46,48.3) ; C34.2 51.9,43.76 v1(51.9,45.4) ; v1(46,50.3) C32.2
E6071_CT_1.8V: length 180.4
  TOP w0.254: U1.34 54.55,45.35 54.8,45.6 54.55,45.85 U1.35
  TOP w0.508: C8.2 C7.2 v1(30.1,22.2) 30.1,20.45 J2.4 32.03,18.52 J2.5 ; C20.2 C19.2 v1(80,22.2) 80,20.05 J5.4 ; J3.5 65.03,18.52 J3.4 63.4,20.15 v1(63.4,22.2) C13.2 C14.2 ; J4.4 46.9,20.15 v1(46.9,22.2) C15.2 C16.2 ; v1(58.5,43.8) 56.9,43.8 55.1,45.6 54.8,45.6 ; J1.4 13.6,20.45 v1(13.6,22.2) C5.2 C6.2
  BOTTOM w0.508: v1(58.5,43.8) 58.5,42.54 C31.2 L1.1 ; v1(58.5,43.8) 85.4,43.8 90,39.2 90,23.2 89,22.2 v1(80,22.2) v1(63.4,22.2) v1(46.9,22.2) v1(30.1,22.2) v1(13.6,22.2) ; v1(58.5,43.8) 58.5,44.76 C30.2 ; J5.4 81.53,18.52 J5.5 ; J4.5 48.53,18.52 J4.4 ; J1.4 15.53,18.52 J1.5
E6071_VDD_CORE_1.2V: length 42.5
  TOP w0.254: U1.17 45.45,43.65 45,43.2 v1(44.2,43.2) ; U1.57 v1(48.95,51.85) ; v1(57,46) 56.65,46.35 U1.36 ; U1.2 v1(45.95,51.85)
  BOTTOM w0.508: v1(57,46) 56.7,46.3 C25.2 55.56,47.22 C29.2 56.34,50.86 55.35,51.85 v1(48.95,51.85) ; v1(48.95,51.85) v1(45.95,51.85) 44.31,51.85 C27.2 44.26,52.04 43.5,52.8 42.01,52.8 41.5,52.29 41.5,45.49 42.59,44.4 C26.2 42.74,44.26 43.8,43.2 v1(44.2,43.2) ; v1(48.95,51.85) 48.95,53.49 C28.2
INTN: length 13
  TOP w0.254: D1.2 65.63,48.85 U1.41
MDC: length 26.7
  TOP w0.254: v1(60.4,48.1) 59.7,47.4 59.2,47.4 58.75,47.85 U1.39 ; v1(54.5,63.2) R28.1
  BOTTOM w0.254: v1(60.4,48.1) 60.4,57.3 v1(54.5,63.2)
MDIO: length 27.1
  TOP w0.254: v1(59.5,48.1) 59.25,48.35 U1.40 ; v1(53,63.2) R27.1 R29.1
  BOTTOM w0.254: v1(59.5,48.1) 59.5,56.7 v1(53,63.2)
P5_ID0: length 13.9
  TOP w0.254: U1.55 49.95,60.69 R12.1
P5_ID1: length 13.5
  TOP w0.254: U1.54 50.45,61.69 R13.1
P5_INDV: length 14.3
  TOP w0.254: U1.56 49.45,59.69 R11.1
P5_MODE0: length 32
  TOP w0.254: U1.47 58.35,51.85 65.2,58.7 76.8,58.7 77.81,59.71 SW2.8
P5_MODE1: length 32
  TOP w0.254: U1.46 58.56,51.35 65.41,58.2 76.9,58.2 77.93,57.17 SW2.7
P5_MODE2: length 30.3
  TOP w0.254: U1.45 58.76,50.85 61.51,53.6 77,53.6 78.03,54.63 SW2.6
P5_MODE3: length 30.3
  TOP w0.254: SW2.5 77.91,52.09 76.9,53.1 61.72,53.1 58.97,50.35 U1.44
P5_OUTCLK: length 13.3
  TOP w0.254: R15.1 52.95,62.19 U1.49
P5_OUTDV: length 13.7
  TOP w0.254: R14.1 52.45,61.19 U1.50
R0_LED: length 22.4
  TOP w0.254: R40.1 42.92,63 48.45,57.47 U1.58
R1_LED: length 21.2
  TOP w0.254: R39.1 43.71,61.5 47.95,57.26 U1.59
R2_LED: length 20
  TOP w0.254: U1.60 47.45,57.06 44.51,60 R38.1
RESETN: length 23.5
  TOP w0.254: KEY1.1 74.6,45.9 73.6,46.9 70.9,46.9 70.04,46.04 R41.2 C40.1 67.26,45 59.7,45 57.85,46.85 U1.37
RMII0_CRS_DV: length 4.2
  TOP w0.254: R14.2 TP7.1
RMII0_MDC: length 4.2
  TOP w0.254: R28.2 TP10.1
RMII0_MDIO: length 4.2
  TOP w0.254: R27.2 TP9.1
RMII0_TXD0: length 4.2
  TOP w0.254: R12.2 TP5.1
RMII0_TXD1: length 4.2
  TOP w0.254: R13.2 TP6.1
RMII0_TXEN: length 4.2
  TOP w0.254: R11.2 TP4.1
RXN0: length 53.5
  TOP w0.203: U1.8 43.97,48.85 43.93,48.9 37.27,48.9 36.31,47.93 36.31,45.11 35.5,44.3 33.56,44.3 R9.2 31.77,44.3 22.37,44.3 16.91,38.83 16.91,19.9 J1.6
RXN1: length 59.6
  TOP w0.203: U1.15 43.97,45.35 43.93,45.3 42.9,45.3 42.3,44.7 42.3,36.5 39.45,33.65 33.61,33.65 R10.2 31.72,33.65 29.35,33.65 28.4,32.7 28.4,28 29.6,26.8 35.7,26.8 37.8,24.7 37.8,16.5 36.8,15.5 33.9,15.5 33.3,16.1 J2.6
RXN2: length 28.6
  TOP w0.203: U1.19 46.45,43.37 46.4,43.33 46.4,32.66 R24.2 46.35,31.02 46.35,27.52 47.37,26.51 49.19,26.51 50.2,25.5 50.2,22.53 48.91,21.23 48.91,20.68 J4.6
RXN3: length 51.9
  TOP w0.203: J3.6 66.3,16.2 67,15.5 69.7,15.5 70.6,16.4 70.6,24.2 66.91,27.89 58.53,27.89 57.6,28.83 57.6,30.97 R25.2 57.6,32.76 57.6,34.7 55.4,36.9 52.93,36.9 50,39.83 50,43.33 49.95,43.37 U1.26
RXN4: length 52.6
  TOP w0.203: J5.6 82.2,20.39 82.2,21.5 83.1,22.4 83.1,33.5 81.1,35.5 66.93,35.5 R33.2 65.14,35.5 60.6,35.5 56.79,39.31 53.79,39.31 51.4,41.7 51.4,43.33 51.45,43.37 U1.29
RXP0: length 58.5
  TOP w0.203: U1.7 43.97,49.35 43.93,49.3 37.1,49.3 35.9,48.1 35.9,45.27 35.33,44.7 33.5,44.7 32.66,45.54 R7.2 31.77,44.7 22.2,44.7 16.5,39 16.5,21.19 15.59,20.29 15.59,19.19 13.65,17.25 J1.3
RXP1: length 60.4
  TOP w0.203: U1.16 43.97,44.85 43.93,44.9 43.07,44.9 42.71,44.53 42.71,36.33 39.62,33.25 33.65,33.25 32.7,32.3 R8.2 31.72,33.25 29.52,33.25 28.81,32.53 28.81,28.17 29.77,27.21 35.87,27.21 38.21,24.87 38.21,16.33 36.97,15.09 33.73,15.09 33.01,15.81 30.93,15.81 J2.3
RXP2: length 32.2
  TOP w0.203: J4.3 46.65,17.25 48.5,19.1 48.5,21.4 49.79,22.69 49.79,25.33 49.03,26.1 47.2,26.1 46.96,26.34 45.95,27.35 45.95,31.02 R22.2 46,32.76 46,43.33 45.95,43.37 U1.18
RXP3: length 53.4
  TOP w0.203: U1.27 50.45,43.37 50.4,43.33 50.4,40 53.09,37.31 55.57,37.31 58,34.87 58,32.76 R23.2 58,30.97 58,29 58.7,28.3 67.07,28.3 71.01,24.37 71.01,16.23 69.87,15.09 66.83,15.09 66.01,15.91 63.83,15.91 J3.3
RXP4: length 56.5
  TOP w0.203: J5.3 79.75,17.25 81.59,19.09 81.59,21.47 82.69,22.57 82.69,33.33 80.93,35.1 66.93,35.1 R32.2 65.14,35.1 60.43,35.1 56.63,38.9 53.63,38.9 51,41.53 51,43.33 50.95,43.37 U1.28
TXN0: length 72.7
  TOP w0.203: U1.11 43.97,47.35 43.93,47.4 38.87,47.4 38.21,46.73 38.21,42.21 36.69,40.69 33.5,40.69 32.66,39.86 ; R5.2 32.66,39.86 ; 32.66,39.86 31.87,40.65 25.12,40.65 22.51,38.03 22.51,17.93 19.47,14.89 9.53,14.89 8.29,16.13 8.29,18.77 8.93,19.41 10.28,19.41 10.8,18.89 10.99,18.79 11.27,18.88 J1.2
TXN1: length 56.9
  TOP w0.203: J2.2 28.2,19.77 28.2,15.9 27.4,15.1 25.7,15.1 24.5,16.3 24.5,35.1 26.8,37.4 31.77,37.4 R6.2 33.56,37.4 38.23,37.4 40.09,39.27 40.09,45.79 41.1,46.8 43.93,46.8 43.97,46.85 U1.12
TXN2: length 52.9
  TOP w0.203: J4.2 44.27,18.88 43.99,18.79 43.8,18.89 43.08,19.61 41.83,19.61 41.39,19.17 41.39,15.93 42.63,14.69 52.67,14.69 54.41,16.43 54.41,24.59 50.11,28.89 50.11,31.1 50.87,31.86 R18.2 50.1,32.66 50.1,33.57 47.9,35.77 47.9,43.33 47.95,43.37 U1.22
TXN3: length 42.1
  TOP w0.203: J3.2 61.28,19.73 61.28,15.58 60.7,15 58.7,15 57.2,16.5 57.2,25.13 53.9,28.43 53.9,30.97 R20.2 53.89,32.76 53.89,34.03 53.13,34.79 51.53,34.79 48.5,37.83 48.5,43.33 48.45,43.37 U1.23
TXN4: length 80.3
  TOP w0.203: U1.32 52.95,43.37 52.9,43.33 52.9,42.7 54.3,41.3 58.07,41.3 60.17,39.2 65.14,39.2 R31.2 66.04,40.06 66.9,39.2 83.9,39.2 87.2,35.9 87.2,16.9 85.4,15.1 75.2,15.1 74.1,16.2 74.1,19.1 74.68,19.68 75.98,19.68 76.74,18.92 76.99,18.79 77.27,18.88 J5.2
TXP0: length 71.1
  TOP w0.203: J1.1 10.9,18.16 10.81,18.43 10.56,18.56 10.11,19 9.1,19 8.7,18.6 8.7,16.3 9.7,15.3 19.3,15.3 22.1,18.1 22.1,38.2 24.95,41.05 31.82,41.05 R4.2 33.46,41.1 36.53,41.1 37.8,42.37 37.8,46.9 38.7,47.8 43.93,47.8 43.97,47.85 U1.10
TXP1: length 52.6
  TOP w0.203: J2.1 27.79,16.41 27.79,16.07 27.23,15.51 25.87,15.51 24.91,16.47 24.91,34.93 26.97,37 31.77,37 R1.2 33.56,37 38.4,37 40.5,39.1 40.5,45.63 41.27,46.4 43.93,46.4 43.97,46.35 U1.13
TXP2: length 50.7
  TOP w0.203: U1.21 47.45,43.37 47.5,43.33 47.5,35.6 49.69,33.41 49.69,32.66 R16.2 48.94,31.86 49.7,31.1 49.7,28.73 54,24.43 54,16.6 52.5,15.1 42.8,15.1 41.8,16.1 41.8,19 42,19.2 42.91,19.2 43.56,18.56 43.81,18.43 43.9,18.16 J4.1
TXP3: length 38.6
  TOP w0.203: U1.24 48.95,43.37 48.9,43.33 48.9,38 51.7,35.2 53.3,35.2 54.3,34.2 54.3,32.76 R19.2 54.3,30.97 54.3,28.6 57.61,25.29 57.61,16.67 58.87,15.41 60.53,15.41 60.88,15.75 60.88,16.32 J3.1
TXP4: length 78.1
  TOP w0.203: J5.1 76.9,18.16 76.81,18.43 76.5,18.59 75.81,19.27 74.85,19.27 74.51,18.93 74.51,16.37 75.37,15.51 85.23,15.51 86.79,17.07 86.79,35.73 83.73,38.8 66.9,38.8 66.04,37.94 R30.2 65.14,38.8 60,38.8 57.91,40.89 54.13,40.89 52.5,42.53 52.5,43.33 52.45,43.37 U1.31
XTAL_IN: length 18.9
  TOP w0.254: U1.3 31.99,51.35 C39.2 29.74,50.8 28.2,50.8 27.3,51.7 U2.3
XTAL_OUT: length 16.4
  TOP w0.254: U2.1 30.23,49.7 30.43,49.5 C38.2 32.49,50.85 U1.4
N16836550: length 13.1
  TOP w0.254: R2.2 35.11,49.85 U1.6
N16838678: length 30.8
  TOP w0.254: R38.2 27.8,60 24.73,56.93 v1(21,56.93)
  BOTTOM w0.254: v1(21,56.93) 14.23,56.93 13.5,56.2 13.5,46.7 v1(12,45.2)
N16838681: length 28.3
  TOP w0.254: v1(21,57.66) 24.71,57.66 28.55,61.5 R39.2
  BOTTOM w0.254: v1(21,57.66) 13.46,57.66 12.8,57 12.8,50 v1(12,49.2)
N16838688: length 25.5
  TOP w0.254: v1(21,58.4) 24.8,58.4 29.4,63 R40.2
  BOTTOM w0.254: v1(12,53.2) 12,57.2 13.2,58.4 v1(21,58.4)
N16857523: length 4.6
  TOP w0.508: R4.1 v1(29.9,41.9) ; R5.1 v1(29.9,39.8)
  BOTTOM w0.508: v1(29.9,39.8) 29.9,40.76 C2.1 29.9,40.84 v1(29.9,41.9)
N16857564: length 4.7
  TOP w0.508: R9.1 v1(29.9,43.4) ; R7.1 v1(29.9,45.6)
  BOTTOM w0.508: v1(29.9,45.6) 29.9,44.54 C4.1 29.9,44.46 v1(29.9,43.4)
N16859623: length 4.7
  TOP w0.508: R1.1 v1(29.9,36.1) ; R6.1 v1(29.9,38.3)
  BOTTOM w0.508: v1(29.9,36.1) 29.9,37.16 C3.1 29.9,37.24 v1(29.9,38.3)
N16859644: length 4.8
  TOP w0.508: R10.1 v1(29.9,34.6) ; R8.1 v1(29.9,32.3)
  BOTTOM w0.508: v1(29.9,34.6) 29.9,33.54 C1.1 29.9,33.46 v1(29.9,32.3)
N16860087: length 4.5
  TOP w0.508: R16.1 v1(48.9,29.1) ; R18.1 v1(50.9,29.1)
  BOTTOM w0.508: v1(50.9,29.1) 49.94,29.1 C9.1 49.86,29.1 v1(48.9,29.1)
N16860108: length 4.6
  TOP w0.508: R24.1 v1(47.2,29.1) ; R22.1 v1(45.1,29.1)
  BOTTOM w0.508: v1(47.2,29.1) 46.14,29.1 C11.1 46.06,29.1 v1(45.1,29.1)
N16860576: length 4.7
  TOP w0.508: R20.1 v1(53,29.1) ; R19.1 v1(55.2,29.1)
  BOTTOM w0.508: v1(55.2,29.1) 54.14,29.1 C10.1 54.06,29.1 v1(53,29.1)
N16860597: length 4.7
  TOP w0.508: R25.1 v1(56.7,29.1) ; R23.1 v1(58.9,29.1)
  BOTTOM w0.508: v1(58.9,29.1) 57.84,29.1 C12.1 57.76,29.1 v1(56.7,29.1)
N16861090: length 4.7
  TOP w0.508: R31.1 v1(68.8,40.1) ; R30.1 v1(68.8,37.9)
  BOTTOM w0.508: v1(68.8,40.1) 68.8,38.94 C17.1 68.8,38.86 v1(68.8,37.9)
N16861111: length 4.7
  TOP w0.508: R33.1 v1(68.8,36.4) ; R32.1 v1(68.8,34.2)
  BOTTOM w0.508: v1(68.8,36.4) 68.8,35.24 C18.1 68.8,35.16 v1(68.8,34.2)
N16866521: length 2.4
  TOP w0.254: D14.1 R42.1
N16892343: length 3.1
  TOP w0.508: C43.1 22,63.34 22,65.36
  TOP w2: 22,65.36 U21.2
N16893416: length 16.6
  TOP w0.254: R43.1 69.49,49.35 U1.42
N16893933: length 4.3
  TOP w0.254: R34.2 72.59,59.7 SW2.1
N16893936: length 4.4
  TOP w0.254: R35.2 72.47,57.3 SW2.2
N16893945: length 4.4
  TOP w0.254: R36.2 72.57,54.6 SW2.3
N16893954: length 4.3
  TOP w0.254: R37.2 72.59,52.1 SW2.4
N16894369: length 1.9
  TOP w2: 18.2,65 19.46,66.26 U21.1
N168368250: length 1.6
  TOP w0.254: D1.1 R26.1

## Copper pours and planes (outline as drawn; the poured copper is in the pictures)
GND on TOP: 10.8,72.7 84.8,72.7 92.1,65.4 92.1,23.4 89.7,21 5.7,21 3.7,23 3.7,65.6 ; 24 cut-outs
GND on BOTTOM: 10.8,72.7 84.8,72.7 92.1,65.4 92.1,23.4 89.7,21 5.7,21 3.7,23 3.7,65.6 ; 1 cut-out
GND_EARTH on TOP, BOTTOM: 3.3,0.1 1.05,1.05 0.1,3.3 0.1,71.7 1.05,73.95 3.3,74.9 92.5,74.9 94.75,73.95 95.7,71.7 95.7,3.3 94.75,1.05 92.5,0.1 ; 1 cut-out
VCC_3.3V_SWITCH on TOP: 27.9,69.4 30.9,69.4 32.1,70.6 38.9,70.6 39.3,70.2 39.3,67.1 39,66.8 32.2,66.8 31,68 27.9,68
VCC_3.3V_SWITCH on BOTTOM: 36.9,68.4 37.6,68.4 37.9,68.1 37.9,67.7 37.5,67.3 37.5,66.9 37.4,66.8 37,66.8 36.8,67 36.8,68.3
VCC_5V on TOP: 9.9,59.9 13.7,59.9 13.8,60 13.8,62.6 14.4,63.2 15.4,63.2 15.9,63.7 15.9,66.1 15.3,66.7 11.3,66.7 9.7,65.1 9.7,60.1
E6071_AVDD_1.8V on TOP: 52.1,45 52.1,45.6 51.7,46 46.8,46 46.6,46.2 46.6,50.2 46.3,50.5 45.7,50.5 45.7,45.6 46.3,45
E6071_AVDD_1.8V on BOTTOM: 54.5,41.6 54.5,43.7 54.1,44.1 51.6,44.1 51.6,43.2 52.8,43.2 53.2,42.8 53.2,41.6
INTN on TOP (solid shape): 66.89,48.71 66.41,48.08 65.88,47.49 65.65,48.7 65.68,48.8 65.77,48.84
P5_MODE0 on TOP (solid shape): 82.43,59.71 81.3,59.16 80.78,59.63 80.75,59.71 80.78,59.79 81.3,60.26
P5_MODE1 on TOP (solid shape): 82.43,57.17 81.3,56.62 80.78,57.09 80.75,57.17 80.78,57.25 81.3,57.72
P5_MODE2 on TOP (solid shape): 82.43,54.63 81.3,54.08 80.78,54.55 80.75,54.63 80.78,54.71 81.3,55.18
P5_MODE3 on TOP (solid shape): 82.43,52.09 81.3,51.54 80.78,52.01 80.75,52.09 80.78,52.17 81.3,52.64
RXN4 on TOP (solid shape): 82.98,20.39 82.81,19.77 82.2,20.39 82.2,21.03 82.27,21.1
XTAL_IN on TOP (solid shape): 28,51.12 27.96,51.03 27.87,51 26.73,51.2 27.28,51.93 27.88,52.6
N16838678 on TOP: 10.4,46.8 10.4,43.6 13.7,43.6 13.7,46.8
N16838681 on TOP: 10.4,50.8 10.4,47.6 13.7,47.6 13.7,50.8
N16838688 on TOP: 10.4,54.8 10.4,51.6 13.7,51.6 13.7,54.8
N16892343 on TOP: 21.3,65 21.3,62.6 27.9,62.6 30.3,65 30.3,67 27.9,67 26,65.1 23.6,65.1 23.1,65.6 21.9,65.6
N16893933 on TOP (solid shape): 72.63,59.71 71.5,59.16 70.97,59.62 70.94,59.7 70.97,59.78 71.5,60.26
N16893936 on TOP (solid shape): 72.63,57.17 71.5,56.62 70.85,57.22 70.82,57.32 70.87,57.4 71.5,57.72
N16893945 on TOP (solid shape): 72.63,54.63 71.5,54.08 70.95,54.52 70.92,54.6 70.95,54.68 71.5,55.18
N16893954 on TOP (solid shape): 72.63,52.09 71.5,51.54 70.97,52.02 70.94,52.1 70.97,52.18 71.5,52.64
N16894369 on TOP: 14.9,59.9 18.7,59.9 18.9,60.1 18.9,64.2 19.3,64.6 19.3,65.1 18.4,66 17,66 16.5,65.5 16.5,63.1 16.1,62.7 14.9,62.7
VCC_3.3V_SWITCH on BOTTOM (solid shape): 54.79,55.77 54.29,55.17 54.16,55.13 54.03,55.17 53.52,55.77 54.16,56.46
VCC_3.3V_SWITCH on BOTTOM (solid shape): 47.25,55.81 47.43,55.74 47.51,55.56 47.26,54.6 46.76,55.02 46.34,55.52
C0_LED on TOP (solid shape): 8.92,54.2 8.38,53.59 7.79,54.12 7.77,54.2 7.79,54.28 8.38,54.81
C0_LED on TOP (solid shape): 8.92,50.2 8.38,49.59 7.79,50.12 7.77,50.2 7.79,50.28 8.38,50.81
C0_LED on TOP (solid shape): 8.92,46.2 8.38,45.59 7.79,46.12 7.77,46.2 7.79,46.28 8.38,46.81
C0_LED on TOP (solid shape): 32.08,58.6 32.12,58.69 32.21,58.72 33.12,58.56 32.68,58.08 32.2,57.64
C1_LED on TOP (solid shape): 8.92,52.2 8.38,51.59 7.79,52.12 7.77,52.2 7.79,52.28 8.38,52.81
C1_LED on TOP (solid shape): 8.92,48.2 8.38,47.59 7.79,48.12 7.77,48.2 7.79,48.28 8.38,48.81
C1_LED on TOP (solid shape): 8.92,44.2 8.38,43.59 7.79,44.12 7.77,44.2 7.79,44.28 8.38,44.81
C2_LED on TOP (solid shape): 16.31,54.28 16.33,54.2 16.31,54.12 15.72,53.59 15.18,54.2 15.72,54.81
C2_LED on TOP (solid shape): 16.31,50.28 16.33,50.2 16.31,50.12 15.72,49.59 15.18,50.2 15.72,50.81
C2_LED on TOP (solid shape): 16.31,46.28 16.33,46.2 16.31,46.12 15.72,45.59 15.18,46.2 15.72,46.81
C3_LED on TOP (solid shape): 16.31,52.28 16.33,52.2 16.31,52.12 15.72,51.59 15.18,52.2 15.72,52.81
C3_LED on TOP (solid shape): 16.31,48.28 16.33,48.2 16.31,48.12 15.72,47.59 15.18,48.2 15.72,48.81
C3_LED on TOP (solid shape): 16.31,44.28 16.33,44.2 16.31,44.12 15.72,43.59 15.18,44.2 15.72,44.81
E6071_AVDD_1.8V on BOTTOM (solid shape): 47.15,44.93 47.41,44.95 47.55,44.73 47.36,43.2 46.88,43.6 46.44,44.12
E6071_CT_1.8V on TOP (solid shape): 31.85,18.27 32.03,18.35 32.21,18.27 32.63,17.85 32.03,17.19 31.43,17.85
E6071_CT_1.8V on TOP (solid shape): 64.85,18.27 65.03,18.35 65.21,18.27 65.63,17.85 65.03,17.19 64.43,17.85
E6071_CT_1.8V on TOP (solid shape): 79.75,20.95 79.93,21.14 80.18,21.07 80.86,20.39 80.27,19.73 79.59,20.27
E6071_CT_1.8V on TOP (solid shape): 46.65,21.01 46.81,21.23 47.08,21.17 47.86,20.39 47.28,19.73 46.59,20.23
E6071_CT_1.8V on TOP (solid shape): 63.15,21.01 63.31,21.23 63.58,21.17 64.36,20.39 63.78,19.73 63.09,20.23
E6071_CT_1.8V on BOTTOM (solid shape): 57.1,42.33 57.14,42.2 57.1,42.07 56.54,41.6 55.88,42.2 56.54,42.8
E6071_CT_1.8V on BOTTOM (solid shape): 58.22,42.2 57.52,41.56 56.92,42.07 56.89,42.2 56.92,42.33 57.52,42.84
E6071_CT_1.8V on BOTTOM (solid shape): 15.35,18.27 15.53,18.35 15.71,18.27 16.13,17.85 15.53,17.19 14.93,17.85
E6071_CT_1.8V on BOTTOM (solid shape): 48.35,18.27 48.53,18.35 48.71,18.27 49.13,17.85 48.53,17.19 47.93,17.85
E6071_CT_1.8V on BOTTOM (solid shape): 81.35,18.27 81.53,18.35 81.71,18.27 82.13,17.85 81.53,17.19 80.93,17.85
E6071_CT_1.8V on BOTTOM (solid shape): 58.36,43.68 58.57,43.71 58.73,43.58 58.79,42.84 58.14,42.14 57.52,42.84
E6071_VDD_CORE_1.2V on BOTTOM (solid shape): 56.21,49.23 56.34,49.27 56.47,49.23 56.98,48.63 56.34,47.94 55.71,48.63
E6071_VDD_CORE_1.2V on BOTTOM (solid shape): 43.2,44.86 42.79,44.36 42.28,43.94 41.89,44.82 41.94,45.02 42.14,45.11
E6071_VDD_CORE_1.2V on BOTTOM (solid shape): 43.45,43.8 43.36,43.61 43.16,43.55 42.28,43.94 42.7,44.45 43.2,44.86
E6071_VDD_CORE_1.2V on BOTTOM (solid shape): 43.55,52.5 43.65,52.7 43.87,52.74 44.72,52.26 44.3,51.75 43.8,51.34
RESETN on TOP (solid shape): 70.49,46.62 70.58,46.59 70.62,46.5 70.5,45.54 70.02,45.98 69.58,46.46
RXN0 on TOP (solid shape): 16.83,21.03 16.92,21.06 16.99,21.01 17.41,20.38 16.8,19.76 16.2,20.39
RXN1 on TOP (solid shape): 33.9,19.19 33.37,18.66 33.3,18.63 33.23,18.66 32.7,19.19 33.3,19.82
RXN3 on TOP (solid shape): 66.9,19.19 66.37,18.66 66.3,18.63 66.23,18.66 65.7,19.19 66.3,19.82
RXP0 on TOP (solid shape): 33.22,45.08 33.19,45.01 33.11,44.98 32.2,45.14 32.65,45.62 33.12,46.06
RXP0 on TOP (solid shape): 14.27,17.97 14.36,17.91 14.35,17.8 13.81,17.19 12.97,17.24 13.12,17.97
RXP1 on TOP (solid shape): 33.16,32.86 33.23,32.83 33.26,32.75 33.12,31.84 32.64,32.28 32.2,32.76
RXP2 on TOP (solid shape): 47.27,17.97 47.36,17.91 47.35,17.8 46.81,17.19 45.97,17.24 46.12,17.97
TXN0 on TOP (solid shape): 11.95,19 11.3,18.79 11.22,18.79 11.17,18.85 10.95,19.5 11.73,19.81
TXN1 on TOP (solid shape): 28.82,19.19 28.27,18.64 28.2,18.61 28.13,18.64 27.62,19.19 28.22,19.82
TXN2 on TOP (solid shape): 44.95,19 44.3,18.79 44.22,18.79 44.17,18.85 43.95,19.5 44.73,19.81
TXN2 on TOP (solid shape): 50.92,31.88 51.36,31.4 50.41,31.3 50.34,31.33 50.31,31.41 50.44,32.32
TXN3 on TOP (solid shape): 61.83,19.2 61.36,18.6 61.29,18.57 61.21,18.6 60.62,19.19 61.22,19.82
TXN4 on TOP (solid shape): 66.6,39.6 66.57,39.53 66.49,39.5 65.58,39.64 66.02,40.12 66.5,40.56
TXN4 on TOP (solid shape): 77.95,19 77.3,18.79 77.22,18.79 77.17,18.85 76.95,19.5 77.73,19.81
TXP0 on TOP (solid shape): 10.87,18.25 10.95,18.25 11,18.19 11.22,17.54 10.44,17.23 10.22,18.04
TXP2 on TOP (solid shape): 43.87,18.25 43.95,18.25 44,18.19 44.22,17.54 43.44,17.23 43.22,18.04
TXP2 on TOP (solid shape): 49.5,31.41 49.47,31.33 49.4,31.3 48.44,31.4 48.88,31.88 49.36,32.32
TXP4 on TOP (solid shape): 66.49,38.5 66.57,38.47 66.6,38.4 66.5,37.44 66.02,37.88 65.58,38.36
TXP4 on TOP (solid shape): 76.87,18.25 76.95,18.25 77,18.19 77.22,17.54 76.44,17.23 76.22,18.04
XTAL_OUT on TOP (solid shape): 30.15,49.78 30.17,49.7 30.15,49.62 29.48,49 28.87,49.7 29.48,50.4
N16866521 on TOP (solid shape): 12.01,57.48 12.03,57.4 12.01,57.32 11.42,56.79 10.88,57.4 11.42,58.01
N168368250 on TOP (solid shape): 69.51,48.18 69.53,48.1 69.51,48.02 68.92,47.49 68.38,48.1 68.92,48.71

Small or netless copper shapes (teardrops, artwork), in the pictures only: 118 on TOP, 62 on BOTTOM

## Text on the board
User.Comments: CR_HR911105A_4
Ref Des/Silkscreen Top: HYOC | NAME:88E6071_TEST_V10B.BRD | DATE:2017_08_15 | DC5V | PORT5 | LINK | SPEED | 1 | 0 | P5_MODE0 | P5_MODE1 | P5_MODE2 | P5_MODE3 | TXEN | T0 | T1 | CRS | CLK | MDIO | MDC
DEVICE_TYPE_TOP: FIGURE | SIZE | 0.3048 | 0.4572 | 0.889 | 1.0008 | 1.7 | 3.4036 | 3.3 | 3.0x1.0 | DRILL CHART: TOP to BOTTOM | ALL UNITS ARE IN MILLIMETERS | PLATED | NON-PLATED | QTY | 353 | 9 | 6 | 60 | 10 | 4 | 1 | 2
